# Altium PCB PCB.PcbDoc (part 1 of 2)
Units mil, origin at the board's own origin, x right, y up, seen from the top; angles counter-clockwise.
Board outline 7300 x 4900 mil, 2 copper layers (Top Layer, Bottom Layer); 73 components, 57 nets, 300 pads, 64 vias.
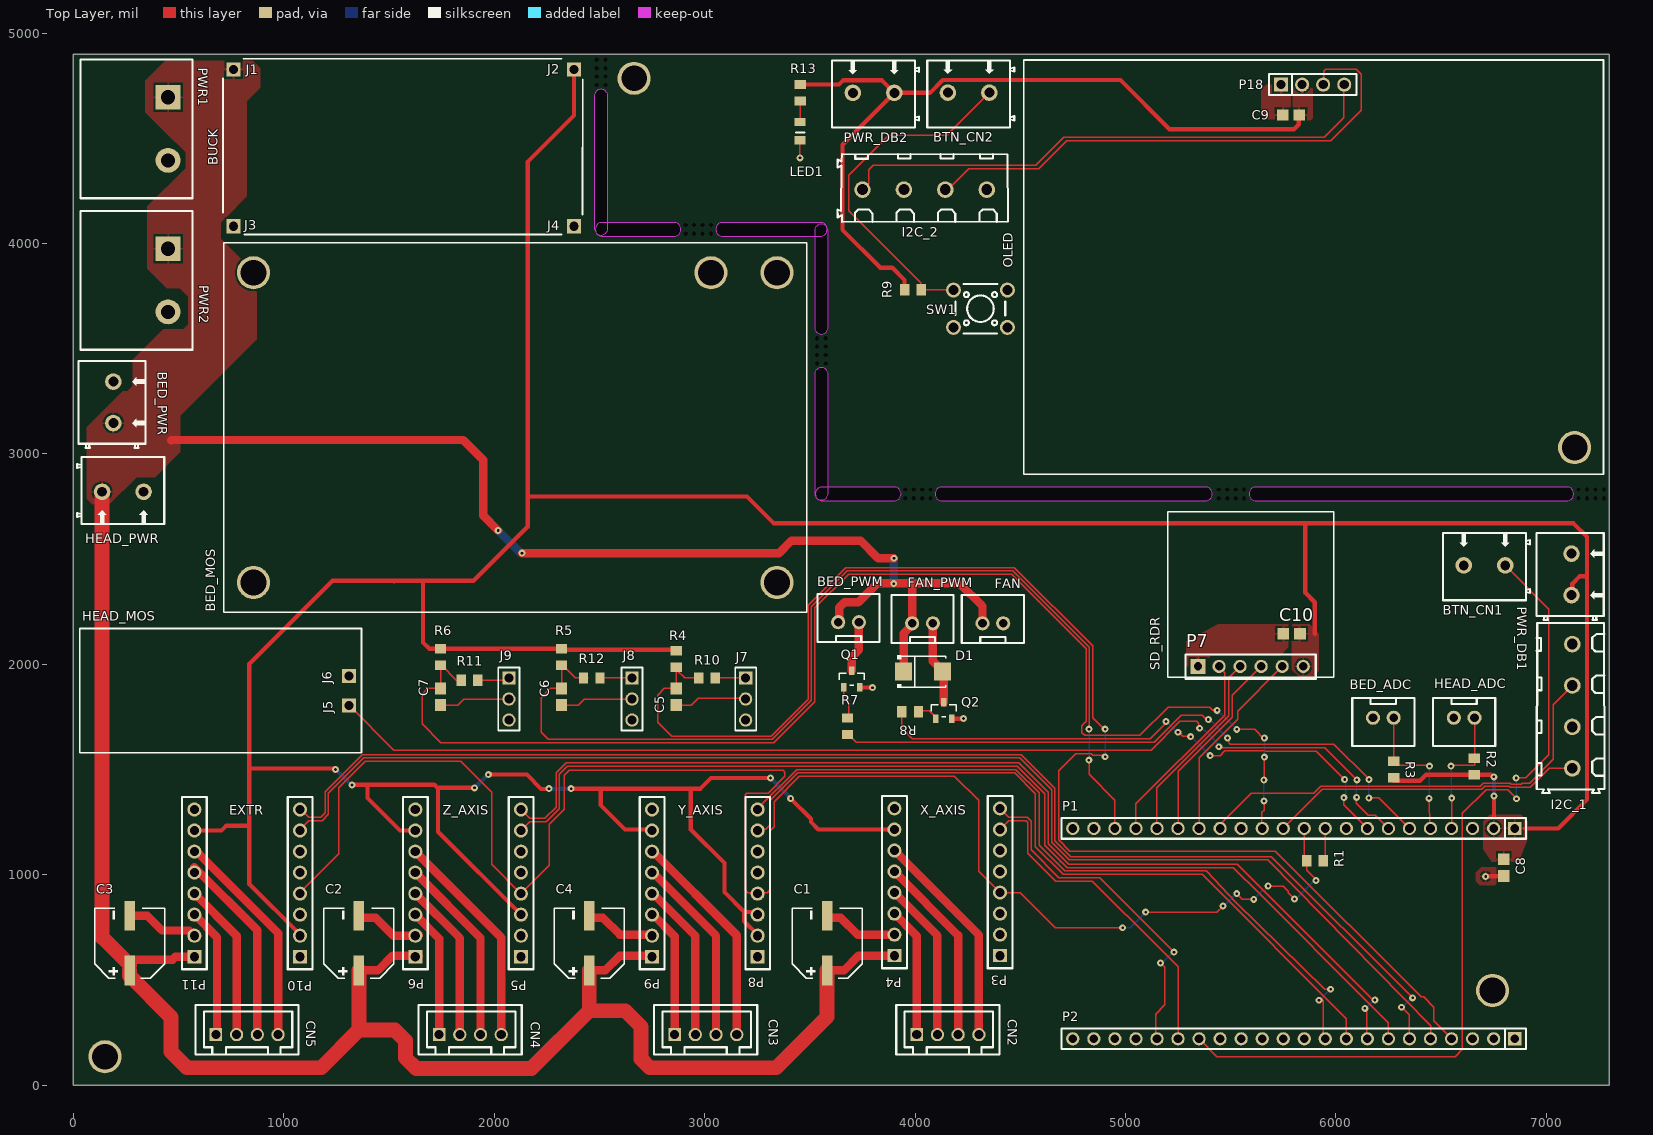
[diagram p0: Top Layer view]
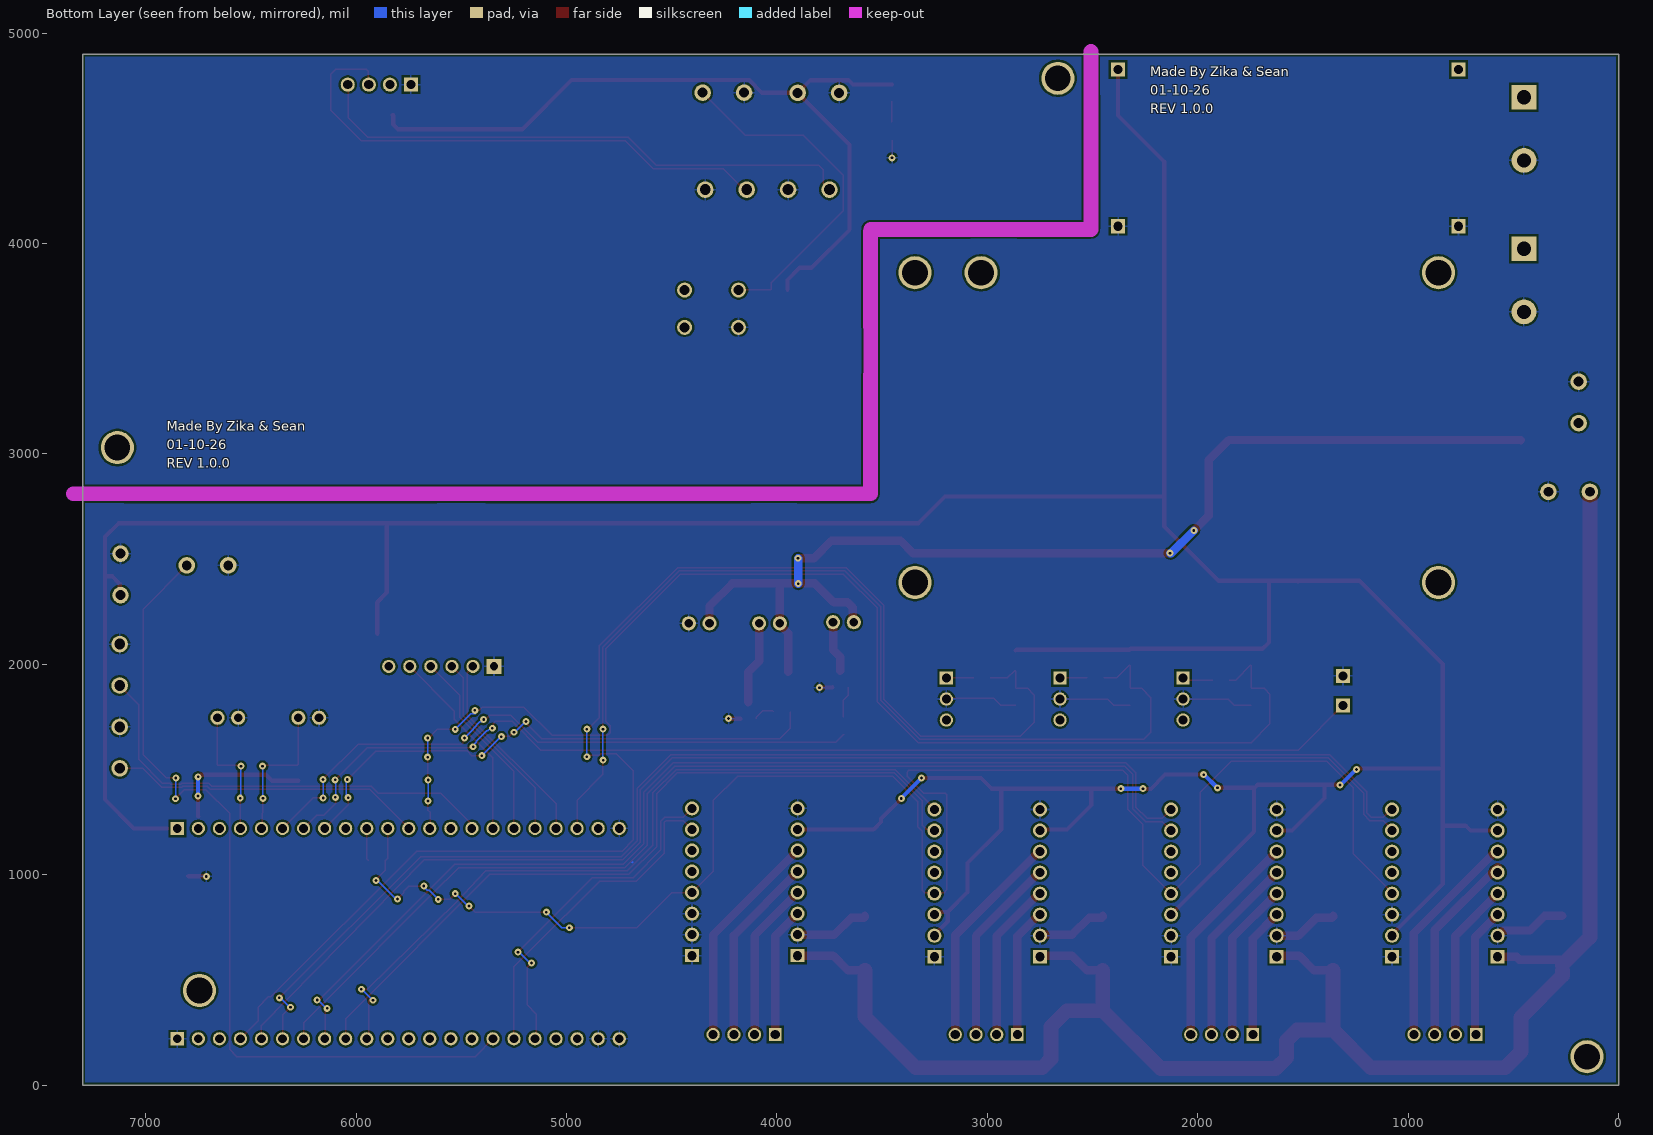
[diagram p1: Bottom Layer view, seen from below]

## Layer stack, top to bottom
Top Solder: solder mask 0.4, Solder Resist, Dk 3.5
Top Layer: signal copper 1.4
Dielectric 1: dielectric 12.6, FR-4, Dk 4.8
Bottom Layer: signal copper 1.4
Bottom Solder: solder mask 0.4, Solder Resist, Dk 3.5

## Board outline
0,0 7300,0 7300,4900 0,4900
cut-out: 5620,2842.51 ccw(c5620,2810) 5620,2777.49 7098,2777.49 ccw(c7098,2810) 7098,2842.51
cut-out: 4128,2842.51 ccw(c4128,2810) 4128,2777.49 5380,2777.49 ccw(c5380,2810) 5380,2842.51
cut-out: 3901,2777.49 ccw(c3901,2810) 3901,2842.51 3559,2842.51 ccw(c3559,2810) 3559,2777.49
cut-out: 3587.52,3377 ccw(c3555,3377) 3522.48,3377 3522.48,2814 ccw(c3555,2814) 3587.52,2814
cut-out: 3522.48,3602 ccw(c3555,3602) 3587.52,3602 3587.52,4059 ccw(c3555,4059) 3522.48,4059
cut-out: 3550,4034.48 ccw(c3550,4067) 3550,4099.52 3086,4099.52 ccw(c3086,4067) 3086,4034.48
cut-out: 2855,4034.48 ccw(c2855,4067) 2855,4099.52 2513,4099.52 ccw(c2513,4067) 2513,4034.48
cut-out: 2475.49,4072.57 ccw(c2508,4072.57) 2540.51,4072.57 2540.51,4700 ccw(c2508,4700) 2475.49,4700

## Design rules (kind name [scope] priority, off if disabled: settings)
BoardOutlineClearance [All] p1: gap=13 ignorepadtopadclearanceinfootprint=FALSE
Clearance Mousebites [IsPad vs IsKeepout] p1: gap=0 ignorepadtopadclearanceinfootprint=FALSE
Clearance Via_Net_Clr [IsVia vs IsNet] p2: gap=6 ignorepadtopadclearanceinfootprint=FALSE
Clearance Min_Clr [IsNet vs IsNet] p3: gap=10 ignorepadtopadclearanceinfootprint=FALSE
Clearance [All] p4: gap=10 ignorepadtopadclearanceinfootprint=FALSE except(0: Arc-Hole Track-Hole SMDPad-Hole THPad-Hole Via-Hole Fill-Hole Poly-Hole Region-Hole Text-Hole)
ComponentClearance Allow_Nested_Head [InComponent('J5') or InComponent('J6') vs InComponent('DB3')] p1: gap=-10 collisioncheckmode=3 verticalgap=-10 showdistances=FALSE
ComponentClearance Allow_Nested_Buck [InComponent('J1') or InComponent('J2') or InComponent('J3') or InComponent('J4') vs InComponent('DB1')] p2: gap=-10 collisioncheckmode=3 verticalgap=-10 showdistances=FALSE
ComponentClearance ComponentClearance_1 [All] p3: gap=10 collisioncheckmode=3 verticalgap=10 showdistances=FALSE
HoleSize Via_Min_Hole [IsVia] p1: absolutevalues=TRUE maxlimit=100 minlimit=10 maxpercent=80.000 minpercent=20.000
HoleToHoleClearance Pad_To_Via [IsPad vs IsVia] p2: gap=157.48 allowstackedmicrovias=TRUE
HoleToHoleClearance Via_Hole_To_Hole [All] p3: gap=10 allowstackedmicrovias=TRUE
MinimumAnnularRing [IsVia] p1: minimumring=10
PolygonConnect [All] p1: connectstyle=Relief reliefconductorwidth=10 reliefentries=4 polygonreliefangle="90 Angle" airgapwidth=10
RoutingVias Via_Size [All] p1: holewidth=13 width=33 viastyle="Through Hole" minholewidth=13 minwidth=33 maxholewidth=13 maxwidth=33
RoutingVias [All] p2: holewidth=28 width=50 viastyle="Through Hole" minholewidth=28 minwidth=50 maxholewidth=28 maxwidth=50
SilkToSolderMaskClearance [IsPad] p1: minsilkscreentomaskgap=0 clearancetoexposedcopper=TRUE
SolderMaskExpansion [All] p1: expansion=4 istentingtop=FALSE
Width "GND Width" [InNetClass('GND')] p1: maxlimit=40 minlimit=6 preferedwidth=6
Width "Signals Width" [InNetClass('SIG')] p2: maxlimit=15 minlimit=6 preferedwidth=6
Width "Schematic Width Constraint_1" [InNet('24V')] p3: maxlimit=325 minlimit=40 preferedwidth=40
Width "Schematic Width Constraint" [InNetClass('3V3-PWR')] p4: maxlimit=20 minlimit=20 preferedwidth=20
27 further rules are at their usual default settings.

## Classes and differential pairs
net class GND: GND_MB
net class SIG: "BED ADC" "BED MOS PWM" BTN "DIR E" "DIR X" "DIR Y" "DIR Z" "ENDST X" "ENDST Y" "ENDST Z" "FAN PWM" "HEAD ADC" "HEAD MOS PWM" "I2C OLED SCL" "I2C OLED SDA" NetJ7_1 NetJ8_1 NetJ9_1 NetLED1_2 NetQ1_1 NetQ2_1 "OLED SCL" "OLED SDA" "SD FSPI CLK" "SD FSPI CS" "SD FSPI MISO" "SD FSPI MOSI" "STEP E" "STEP X" "STEP Y" "STEP Z" "TMC UART RX" "TMC UART TX" "USER BTN"
net class 24V-PWR: 24V "M1A E" "M1A X" "M1A Y" "M1A Z" "M1B E" "M1B X" "M1B Y" "M1B Z" "M2A E" "M2A X" "M2A Y" "M2A Z" "M2B E" "M2B X" "M2B Y" "M2B Z" NetBED_PWM_2 NetD1_2
net class 3V3-PWR: 3V3_DB 3V3_MB
component class MotherBoard: BED_ADC BED_PWM BED_PWR BTN_CN1 C1 C2 C3 C4 C5 C6 C7 C8 C10 CN2 CN3 CN4 CN5 D1 FAN FAN_PWM HEAD_ADC HEAD_MOS HEAD_PWR I2C_1 J1 J2 J3 J4 J5 J6 J7 J8 J9 P1 P2 P3 P4 P5 P6 P7 P8 P9 P10 P11 PWR1 PWR2 PWR_DB1 Q1 Q2 R1 R2 R3 R4 R5 R6 R7 R8 R10 R11 R12
component class DaughterBoard: BTN_CN2 C9 I2C_2 LED1 OLED P18 PWR_DB2 R9 R13 SD_RDR SW1

## Components (designator, comment, footprint, x,y, rotation, side; value= is the part's Value field where it differs from the comment)
BED_ADC "sh-xh2.54-2p" XH-2P 6225.7,1746 r0 top
BED_MOS "Comment" Bed-MOSFET 2100,3125 r0 top
BED_PWM "sh-xh2.54-2p" XH-2P 3684.3,2200 r180 top
BED_PWR "wj127-5.0-02p-14-00a" Screw-Terminal-2P 190,3245 r90 top
BTN_CN1 "wj127-5.0-02p-14-00a" Screw-Terminal-2P 6706.6,2470 r180 top
BTN_CN2 "wj127-5.0-02p-14-00a" Screw-Terminal-2P 4255,4717 r180 top
BUCK "Comment" DC-Buck-Converter 1565,4460 r0 top
C1 "100uF" Capacitor-100uF 3582,675 r90 top
C2 "100uF" Capacitor-100uF 1357,675 r90 top
C3 "100uF" Capacitor-100uF 267,675 r90 top
C4 "100uF" Capacitor-100uF 2452,675 r90 top
C5 "100nF" Capacitor-100nF-0805 2865,1845.6 r90 top
C6 "100nF" Capacitor-100nF-0805 2320,1845.6 r90 top
C7 "100nF" Capacitor-100nF-0805 1745,1845.6 r90 top
C8 "22uF" Capacitor-22uF-0805 6798,1033.6 r90 top
C9 "22uF" Capacitor-22uF-0805 5786.6,4611 r180 top
C10 "22uF" Capacitor-22uF-0805 5790,2145 r180 top
CN2 "sh-xh2.54-4p" XH-4P 4155.8,240 r0 top
CN3 "sh-xh2.54-4p" XH-4P 3005,240 r0 top
CN4 "sh-xh2.54-4p" XH-4P 1885.8,240 r0 top
CN5 "sh-xh2.54-4p" XH-4P 825,240 r0 top
D1 "s3mb-13-f" Diode-1N4007-SMA 4038.5,1965 r0 top
FAN "sh-xh2.54-2p" XH-2P 4370,2195 r180 top
FAN_PWM "sh-xh2.54-2p" XH-2P 4035.8,2195 r180 top
HEAD_ADC "sh-xh2.54-2p" XH-2P 6610,1746 r0 top
HEAD_MOS "Head-MOSFET" Head-MOSFET 700,1875 r180 top (schematic designator DB3)
HEAD_PWR "wj127-5.0-02p-14-00a" Screw-Terminal-2P 235,2820 r0 top
I2C_1 "wj127-5.0-04p-14-00a" Screw-Terminal-4P 7124,1800.8 r90 top
I2C_2 "wj127-5.0-04p-14-00a" Screw-Terminal-4P 4045.8,4256 r0 top
J1 "2.54-1*1p针" Male-Header-1P 761,4827 r0 top
J2 "2.54-1*1p针" Male-Header-1P 2379,4827 r0 top
J3 "2.54-1*1p针" Male-Header-1P 761,4082 r0 top
J4 "2.54-1*1p针" Male-Header-1P 2379,4082 r0 top
J5 "2.54-1*1p针" Male-Header-1P 1310,1805 r90 top
J6 "2.54-1*1p针" Male-Header-1P 1310,1945 r0 top
J7 "2.54-1*3p针" Male-Header-3P 3195,1835 r270 top
J8 "2.54-1*3p针" Male-Header-3P 2655,1835 r270 top
J9 "2.54-1*3p针" Male-Header-3P 2070,1835 r270 top
LED1 "ncd0805r1_c84256" RED-LED-0805 3454,4533.7 r90 top
OLED "OLED-I2C" I2C-OLED 5894,3888 r0 top (schematic designator DB4)
P1 "fh2.54-09-22pzd" Female-Header-22P 5800,1220 r180 top
P2 "fh2.54-09-22pzd" Female-Header-22P 5800,220 r180 top
P3 "2.54-1*8p母环保" Female-Header-8P 4404,965 r90 top
P4 "2.54-1*8p母环保" Female-Header-8P 3902,965 r90 top
P5 "2.54-1*8p母环保" Female-Header-8P 2127,960 r90 top
P6 "2.54-1*8p母环保" Female-Header-8P 1625,960 r90 top
P7 "2.54-1*6p" Female-Header-6P 5595,1990 r0 top
P8 "2.54-1*8p母环保" Female-Header-8P 3252,960 r90 top
P9 "2.54-1*8p母环保" Female-Header-8P 2750,960 r90 top
P10 "2.54-1*8p母环保" Female-Header-8P 1077,960 r90 top
P11 "2.54-1*8p母环保" Female-Header-8P 575,960 r90 top
P18 "2.54-1*4P" Female-Header-4P 5890,4755 r0 top
PWR1 "dbt30s-7.62-2p-bk-p" Barrier-Terminal-2P 450,4545 r270 top
PWR2 "dbt30s-7.62-2p-bk-p" Barrier-Terminal-2P 450,3825 r270 top
PWR_DB1 "wj127-5.0-02p-14-00a" Screw-Terminal-2P 7120,2427.4 r90 top
PWR_DB2 "wj127-5.0-02p-14-00a" Screw-Terminal-2P 3803,4716 r180 top
Q1 "ktc3265(range:160-320)" NPN-SOT23-30V 3699.3,1930 r270 top
Q2 "ktc3265(range:160-320)" NPN-SOT23-30V 4136.5,1780 r270 top
R1 "4.7k" Resistor-4.7k-0805 5900.7,1066 r180 top value=4.7kΩ
R2 "4.7k" Resistor-4.7k-0805 6657.3,1514.6 r90 top value=4.7kΩ
R3 "4.7k" Resistor-4.7k-0805 6275,1500.7 r270 top value=4.7kΩ
R4 "4.7k" Resistor-4.7k-0805 2865,2025.6 r90 top value=4.7kΩ
R5 "4.7k" Resistor-4.7k-0805 2320,2034.3 r90 top value=4.7kΩ
R6 "4.7k" Resistor-4.7k-0805 1745,2034.3 r90 top value=4.7kΩ
R7 "1k" Resistor-1k-0805 3679.3,1705.7 r270 top value=1kΩ
R8 "1k" Resistor-1k-0805 3977.1,1775 r0 top value=1kΩ
R9 "4.7k" Resistor-4.7k-0805 3990,3780 r180 top value=4.7kΩ
R10 "1k" Resistor-1k-0805 3011.6,1935 r0 top value=1kΩ
R11 "1k" Resistor-1k-0805 1883.3,1925 r0 top value=1kΩ
R12 "1k" Resistor-1k-0805 2463.6,1935 r0 top value=1kΩ
R13 "220" Resistor-220-0805 3454,4716.4 r270 top value=220Ω
SD_RDR "SD-Card-Module" SD-Card-Module 5596,2331 r180 top (schematic designator DB5)
SW1 "ts6685h-250gf" Tactile-SPST-Long 4311,3690 r0 top

## Footprints (in the part's own frame and the unit in brackets; to place one, negate y for a bottom-side part, rotate by r counter-clockwise, add the part's x,y. Pads: shape width x height; smd on the part's side, far side on the other; paste and mask are expansions set on the pad)
Barrier-Terminal-2P [mil]
  rect 118.1x118.1 hole 66.9: 1(-150,0)
  round 118.1 hole 66.9: 2(150,0)
  silkscreen extent -330,-415 330,116
Bed-MOSFET [mm]
  round 4 hole 3.1 unplated: 1(-31.6,-18.7) 1(-31.6,18.7) 1(31.6,-18.7) 1(31.6,18.7)
  silkscreen extent -35.2,-22.3 35.2,22.3
Capacitor-22uF-0805 [mil]
  rect 55.5x53.1 smd paste-3937 mask+2: 1(-39.4,0) 2(39.4,0)
Capacitor-100nF-0805 [mil]
  rect 55.5x53.1 smd paste-3937 mask+2: 1(-39.4,0) 2(39.4,0)
Capacitor-100uF [mil]
  rect 142.1x49.6 smd: 1(-129.7,0) 2(129.7,0)
  silkscreen extent -166,-166 166,166
DC-Buck-Converter [mil]
  silkscreen extent -854,-417 855,417
Diode-1N4007-SMA [mil]
  rect 80.6x86.3 smd: 1(-92.9,0) 2(93,0)
  silkscreen extent -123,-77 108,77
Female-Header-4P [mm]
  rect 1.7x1.7 hole 1.1 paste+0 mask+0.051: 1(-3.81,0)
  round 1.7 hole 1.1 paste+0 mask+0.051: 2(-1.27,0) 3(1.27,0) 4(3.81,0)
  silkscreen extent -5.29,-1.27 5.29,1.27
Female-Header-6P [mil]
  rect 70.9x70.9 hole 40.2: 1(-250,0)
  round 63 hole 40.2: 2(-150,0) 3(-50,0) 4(50,0) 5(150,0) 6(250,0)
  silkscreen extent -310,-59 310,56
Female-Header-8P [mil]
  rect 62x66.9 hole 43.3: 1(-350,0)
  round 66.9 hole 43.3: 2(-250,0) 3(-150,0) 4(-50,0) 5(50,0) 6(150,0) 7(250,0) 8(350,0)
  silkscreen extent -409,-59 410,58
Female-Header-22P [mil]
  rect 63x63 hole 41.3: 1(-1050,0)
  round 63 hole 41.3: 2(-950,0) 3(-850,0) 4(-750,0) 5(-650,0) 6(-550,0) 7(-450,0) 8(-350,0) 9(-250,0) 10(-150,0) 11(-50,0) 12(50,0) 13(150,0) 14(250,0) 15(350,0) 16(450,0) 17(550,0) 18(650,0) 19(750,0) 20(850,0) 21(950,0) 22(1050,0)
  silkscreen extent -1105,-49 1105,49
Head-MOSFET [mil]
  silkscreen extent -669,-295 669,295
I2C-OLED [mil]
  silkscreen extent -1378,-984 1378,984
Male-Header-1P [mil]
  rect 66.9x66.9 hole 43.3: 1(0,0)
Male-Header-3P [mil]
  rect 62x63 hole 43.3 paste+0 mask+2: 1(-100,0)
  round 63 hole 43.3 paste+0 mask+2: 2(0,0) 3(100,0)
  silkscreen extent -150,-50 150,50
NPN-SOT23-30V [mil]
  rect 39.4x25.6 smd: 1(39.3,-37.4) 2(39.3,37.4) 3(-39.4,0)
  silkscreen extent -29,-60 29,60
RED-LED-0805 [mm]
  rect 1x1.35 smd: 1(-1.1,0) 2(1.1,0)
  silkscreen extent -0.18,-0.5 -0.18,0.5
Resistor-1k-0805 [mil]
  rect 44.6x54.2 smd paste-3937 mask+2: 1(-39.3,0) 2(39.4,0)
Resistor-4.7k-0805 [mil]
  rect 44.6x54.2 smd paste-3937 mask+2: 1(-39.3,0) 2(39.4,0)
Resistor-220-0805 [mil]
  rect 44.6x54.2 smd paste-3937 mask+2: 1(-39.3,0) 2(39.4,0)
Screw-Terminal-2P [mil]
  round 78.7 hole 47.2: 1(-98.6,0) 2(98.6,0)
  silkscreen extent -217,-154 197,165
Screw-Terminal-4P [mil]
  round 78.7 hole 51.2: 1(-295.3,0) 2(-98.5,0) 3(98.4,0) 4(295.2,0)
  silkscreen extent -413,-154 395,170
SD-Card-Module [mil]
  silkscreen extent -394,-394 394,394
Tactile-SPST-Long [mil]
  round 70.9 hole 47.2: 1(-128,88.6) 2(127.9,88.6) 3(-128,-88.6) 4(127.9,-88.6)
  silkscreen extent -118,-118 118,118
XH-2P [mil]
  round 66.9 hole 41.3 paste+0 mask+2: 1(49.3,0) 2(-49.2,0)
  silkscreen extent -148,-135 148,94
XH-4P [mil]
  rect 60x63 hole 43.3: 1(-147.6,0)
  round 63 hole 43.3: 2(-49.2,0) 3(49.2,0) 4(147.7,0)
  silkscreen extent -245,-95 245,140

## Part data
BED_ADC BED_PWM FAN FAN_PWM HEAD_ADC: library part XH-2P, "Pins Structure:1x2P Pitch:2.5mm Mounting Type:Through Hole Number of Pins:2P Number of Rows:1 Number of PINs Per Row:2 Current Rating:3A Contact Material:Brass Contact Plating:Tin Operating Temperature:-25℃~+85℃ Operating Temperature:-25℃~+85℃ Voltage Rat", Color=White, Current Rating=3A, Flame Retardant Rating=UL94V-0, JLCPCB Part Class="Extended Part", LCSC Part Name="1x2P 间距:2.5mm 直插", Manufacturer=深海电子, ManufacturerPart=SH-XH2.54-2P, Operating Temperature=-25℃~+85℃, Voltage Rating=250V, AddInBom=yes, Contact Material=Brass, Contact Plating=Tin, ConvertToPcb=yes, Datasheet=https://item.szlcsc.com/datasheet/SH-XH2.54-2P/56320007.html, FootprintName=CONN-TH_2P-P2.50-XH2.54-2P, ModelId=0fe0934827c24a35ba1321e64395c7dc, ModelName=CONN-TH_2P-P2.50-XH2.54-2P, ModelTransform=295.275,228.346,0,180,0,0,-0.002,-20.079,-137.795, Mounting Type="Through Hole", Number of Pins=2P, Number of PINs Per Row=2, Number of Rows=1, Pins Structure=1x2P, Pitch=2.5mm, Plastic Material=PA66, Supplier=LCSC, Supplier Footprint=插件,P=2.5mm, SupplierPart=C53261323, Symbol=SH-XH2.54-2P, X-Length of Bottom Edge on Board (Spacing Line)=7.5mm, Y-Width of Bottom Edge on Board=5.8mm, Z-Height of the Board=7.1mm
BED_PWR BTN_CN1 BTN_CN2 HEAD_PWR PWR_DB1 PWR_DB2: library part Screw-Terminal-2P, "Number of Positions or Pins:1x2P Pitch:5mm Color:Green Mounting Type:Through Hole Number of Pins:2P Number of Rows:1 Number of PINs Per Row:2 Screw Specification:M2.5 Current Rating:15A Voltage Rating (Max):250V Wire Gauge - AWG:14~26 Wire Gauge - mm2:1.5", Color=Green, Current Rating=15A, JLCPCB Part Class="Extended Part", LCSC Part Name="1x2P 5mm 直插 排数:1 每排P数:2", Manufacturer=KANGNEX(康奈克斯电气), ManufacturerPart=WJ127-5.0-02P-14-00A, Operating Temperature=-40℃~+105℃, Voltage Rating (Max)=250V, AddInBom=yes, ConvertToPcb=yes, Datasheet=https://item.szlcsc.com/datasheet/WJ127-5.0-02P-14-00A/4105.html, FootprintName=CONN-TH_2P-P5.00_CPC3703CTR, Height Above Board=10.14mm, ModelId=0c699dafc1fb4759bdee4490ad46ecba, ModelName=CONN-TH_2P-P5.00_CPC3703CTR, ModelTransform=416.145,318.897,0,0,0,0,-11.811,5.315,-149.606, Mounting Type="Through Hole", Number of Pins=2P, Number of PINs Per Row=2, Number of Positions or Pins=1x2P, Number of Rows=1, Pitch=5mm, Screw Specification=M2.5, Supplier=LCSC, Supplier Footprint=插件,P=5mm, SupplierPart=C3703, Symbol=WJ127-5.0-2P, Wire Gauge - AWG=14~26, Wire Gauge - mm2=1.5
C1 C2 C3 C4: library part Capacitor-100uF, "Capacitance:100uF Tolerance:±20% Tolerance:±20% Voltage Rating:50V Ripple Current:146mA@120Hz Equivalent Series Resistance(ESR):- Diameter:8mm Height - Seated (Max):10.2mm Lifetime:2800hrs@105℃ Operating Temperature:-55℃~+105℃ Operating Temperature:-55℃~+", Equivalent Series Resistance(ESR)=-, JLCPCB Part Class="Extended Part", LCSC Part Name="100uF ±20% 50V", Manufacturer=DMBJ(振宝佳), ManufacturerPart="RVT1H101M0810 100UF 50V", Operating Temperature=-55℃~+105℃, Ripple Current=146mA@120Hz, Tolerance=±20%, Voltage Rating=50V, AddInBom=yes, ConvertToPcb=yes, Datasheet=https://item.szlcsc.com/datasheet/RVT1H101M0810%2520100UF%252050V/1060415.html, Diameter=8mm, FootprintName=CAP-SMD_BD8.0-L8.3-W8.3-LS9.1-FD, Height - Seated (Max)=10.2mm, Lifetime=2800hrs@105℃, ModelId=9f9fc6857dc54a0ab164c419dde4584d, ModelName=CAP-SMD_BD8.0-L8.3-W8.3-LS9.1-FD, ModelTransform=358.267,326.771,0,0,0,0,0,0,0, Supplier=LCSC, Supplier Footprint=SMD,D8xL10.2mm, SupplierPart=C970687, Symbol="RVT1H101M0810 100UF 50V"
C5 C6 C7: library part Capacitor-100nF-0805, "Capacitance:100nF Tolerance:±10% Tolerance:±10% Voltage Rating:50V Temperature Coefficient:X7R", JLCPCB Part Class="Extended Part", LCSC Part Name="100nF ±10% 50V", Manufacturer=SAMSUNG(三星), ManufacturerPart=CL21B104KBCNNNC, Temperature Coefficient=X7R, Tolerance=±10%, Voltage Rating=50V, AddInBom=yes, ConvertToPcb=yes, Datasheet=https://item.szlcsc.com/datasheet/CL21B104KBCNNNC/2063.html, FootprintName=C0805, ModelId=8c88e81f49c6409b980720ec8953afb6, ModelName=C0805_L2.0-W1.3-H1.3, ModelTransform=78.74,51.181,0,0,0,0,0,0.0005,0, Supplier=LCSC, Supplier Footprint=0805, SupplierPart=C1711, Symbol=CL21B104KBCNNNC
C8 C9 C10: library part Capacitor-22uF-0805, "Capacitance:22uF Tolerance:±20% Tolerance:±20% Voltage Rating:10V Temperature Coefficient:X5R", JLCPCB Part Class="Extended Part", LCSC Part Name="22uF ±20% 10V", Manufacturer=SAMSUNG(三星), ManufacturerPart=CL21A226MPQNNNE, Temperature Coefficient=X5R, Tolerance=±20%, Voltage Rating=10V, AddInBom=yes, ConvertToPcb=yes, Datasheet=https://item.szlcsc.com/datasheet/CL21A226MPQNNNE/30029.html, FootprintName=C0805, ModelId=8c88e81f49c6409b980720ec8953afb6, ModelName=C0805_L2.0-W1.3-H1.3, ModelTransform=78.74,51.181,0,0,0,0,0,0.0005,0, Supplier=LCSC, Supplier Footprint=0805, SupplierPart=C29277, Symbol=CL21A226MPQNNNE
CN2 CN3 CN4 CN5: library part XH-4P, "Pins Structure:1x4P Pitch:2.5mm Mounting Type:Through Hole Number of Pins:4P Number of Rows:1 Number of PINs Per Row:4 Current Rating:3A Contact Material:Brass Contact Plating:Tin Operating Temperature:-25℃~+85℃ Operating Temperature:-25℃~+85℃ Voltage Rat", Color=White, Current Rating=3A, Flame Retardant Rating=UL94V-0, JLCPCB Part Class="Extended Part", LCSC Part Name="1x4P 间距:2.5mm 直插", Manufacturer=深海电子, ManufacturerPart=SH-XH2.54-4P, Operating Temperature=-25℃~+85℃, Voltage Rating=250V, AddInBom=yes, Contact Material=Brass, Contact Plating=Tin, ConvertToPcb=yes, Datasheet=https://item.szlcsc.com/datasheet/SH-XH2.54-4P/56320009.html, FootprintName=CONN-TH_4P-P2.50_4PIN, ModelId=d6f2687bc06b47fb8e014feb06c7c5ec, ModelName=CONN-TH_4P-P2.50_4PIN, ModelTransform=492.125,224.409,0,180,0,0,0,17.717,-118.11, Mounting Type="Through Hole", Number of Pins=4P, Number of PINs Per Row=4, Number of Rows=1, Pins Structure=1x4P, Pitch=2.5mm, Plastic Material=PA66, Supplier=LCSC, Supplier Footprint=插件,P=2.5mm, SupplierPart=C53261325, SymbolName=SH-XH2.54-4P, X-Length of Bottom Edge on Board (Spacing Line)=12.5mm, Y-Width of Bottom Edge on Board=5.8mm, Z-Height of the Board=7.1mm
D1: library part Diode-1N4007-SMA, "Diode Configuration:1 Independent Voltage - Forward(Vf@If):1.15V@3A Voltage - DC Reverse(Vr):1kV Current - Rectified:3A Reverse Leakage Current (Ir):10uA@1kV Non-Repetitive Peak Forward Surge Current:- Operating Junction Temperature Range:-65℃~+150℃ Opera", Current - Rectified=3A, JLCPCB Part Class="Extended Part", LCSC Part Name="1kV 3A", Manufacturer=DIODES(美台), Manufacturer Part=S3MB-13-F, Non-Repetitive Peak Forward Surge Current=-, Operating Junction Temperature Range=-65℃~+150℃, Reverse Leakage Current (Ir)=10uA@1kV, Voltage - DC Reverse(Vr)=1kV, Voltage - Forward(Vf@If)=1.15V@3A, AddInBom=yes, ConvertToPcb=yes, Datasheet=https://item.szlcsc.com/datasheet/S3MB-13-F/71522.html, Diode Configuration="1 Independent", FootprintName=SMB_L4.6-W3.6-LS5.3-RD, ModelId=6383b9be09eb4825906cf4ce91b85cee, ModelName=SMB_L4.6-W3.6-LS5.3-RD, ModelTransform=212.598,141.732,0,0,0,0,0,0,0, Supplier=LCSC, Supplier Footprint=SMB(DO-214AA), SupplierPart=C70426, Symbol=S3MB-13-F
I2C_1 I2C_2: library part Screw-Terminal-4P, "Number of Positions or Pins:1x4P Pitch:5mm Color:Green Mounting Type:Through Hole Number of Pins:4P Number of Rows:1 Number of PINs Per Row:4 Screw Specification:M2.5 Current Rating:15A Voltage Rating (Max):250V Wire Gauge - AWG:14~26 Wire Gauge - mm2:1.5", Color=Green, Current Rating=15A, JLCPCB Part Class="Extended Part", LCSC Part Name="1x4P 5mm 直插 排数:1 每排P数:4", Manufacturer=KANGNEX(康奈克斯电气), ManufacturerPart=WJ127-5.0-04P-14-00A, Operating Temperature=-40℃~+105℃, Voltage Rating (Max)=250V, AddInBom=yes, ConvertToPcb=yes, Datasheet=https://item.szlcsc.com/datasheet/WJ127-5.0-04P-14-00A/225182.html, FootprintName=CONN-TH_4P-P5.00_WJ127-5.0-4P, Height Above Board=10.14mm, ModelId=30be887f740a4f6bacb9c64f3bb40a03, ModelName=CONN-TH_WJ5.00-LI-4P-127, ModelTransform=807.0748,318.897,0,0,0,0,-9.843,7.874,-157.48, Mounting Type="Through Hole", Number of Pins=4P, Number of PINs Per Row=4, Number of Positions or Pins=1x4P, Number of Rows=1, Pitch=5mm, Screw Specification=M2.5, Supplier=LCSC, Supplier Footprint=插件,P=5mm, SupplierPart=C192779, Symbol=WJ127-5.0-4P, Wire Gauge - AWG=14~26, Wire Gauge - mm2=1.5
J1 J2 J3 J4 J5 J6: library part Male-Header-1P, "Pin Structure:1x1P Pitch:- Row Spacing:- Circluar Pins/Square Pins:Pin Header Mounting Type:Through Hole Number of Rows:1 Number of Pins:1P Current Rating:3A Voltage Rating (Max):- Length of Mating Pin:6mm Insulation Height:2.5mm Length of End Connection", Color=Black, Current Rating=3A, JLCPCB Part Class="Extended Part", LCSC Part Name="1x1P 方针 直插", Manufacturer=BOOMELE(博穆精密), ManufacturerPart=2.54-1*1P针, Operating Temperature=-55℃~+105℃, Voltage Rating (Max)=-, AddInBom=yes, Circluar Pins/Square Pins="Pin Header", Contact Material=Brass, Contact Plating=Gold, ConvertToPcb=yes, Datasheet=https://item.szlcsc.com/datasheet/2.54-1*1P%25E9%2592%2588/82426.html, FootprintName=HDR-TH_1P-P2.54-V-M, Insulation Height=2.5mm, Length of End Connection Pin=3mm, Length of Mating Pin=6mm, ModelId=78ee2cec6acf483d85077eb0624e0da7, ModelName=HDR2.54-M-LI-1X1P, ModelTransform=100,100,0,0,0,0,0,0,-118.11, Mounting Type="Through Hole", Number of Pins=1P, Number of Rows=1, Pin Structure=1x1P, Pitch=-, Row Spacing=-, Supplier=LCSC, Supplier Footprint=插件,P=2.54mm, SupplierPart=C81276, Symbol=Header-Male-2.54_1x1
J7 J8 J9: library part Male-Header-3P, "Pin Structure:1x3P Pitch:2.54mm Row Spacing:- Circluar Pins/Square Pins:Pin Header Mounting Type:Through Hole Number of Rows:1 Number of Pins:3P Current Rating:3A Voltage Rating (Max):- Length of Mating Pin:6mm Insulation Height:2.5mm Length of End Connec", Color=Black, Current Rating=3A, JLCPCB Part Class="Extended Part", LCSC Part Name="1x3P 间距:2.54mm 方针 直插", Manufacturer=BOOMELE(博穆精密), ManufacturerPart=2.54-1*3P针, Operating Temperature=-40℃~+105℃, Voltage Rating (Max)=-, AddInBom=yes, Circluar Pins/Square Pins="Pin Header", Contact Material=Brass, Contact Plating=Gold, ConvertToPcb=yes, Datasheet=https://item.szlcsc.com/datasheet/2.54-1*3P%25E9%2592%2588/50265.html, FootprintName=HDR-TH_3P-P2.54-V-M-1, Insulation Height=2.5mm, Length of End Connection Pin=3mm, Length of Mating Pin=6mm, ModelId=3b8cf4ff435f4f2b912293f2932d0598, ModelName=HDR-M-2.54_1x3, ModelTransform=299.9994,100,0,0,0,0,0,0,-118.11, Mounting Type="Through Hole", Number of Pins=3P, Number of Rows=1, Pin Structure=1x3P, Pitch=2.54mm, Row Spacing=-, Supplier=LCSC, Supplier Footprint=插件,P=2.54mm, SupplierPart=C49257, Symbol=Header-Male-2.54_1x3
LED1: library part RED-LED-0805, "Lamp Holder Type:- Illumination Color:Red Voltage - Forward(Vf):1.6V~2.6V Voltage - Forward(Vf):1.6V~2.6V Power(Watts):65mW Test Current:25mA Wavelength - Dominant:615nm~630nm Wavelength - Dominant:615nm~630nm Peak Wavelength:630nm Peak Wavelength:630nm D", Color Temperature=-, Illumination Color=Red, JLCPCB Part Class="Basic Part", LCSC Part Name=片式发光二极管, Manufacturer=国星光电, ManufacturerPart=NCD0805R1, Operating Temperature=-30℃~+85℃, Power(Watts)=65mW, Test Current=25mA, Voltage - Forward(Vf)=1.6V~2.6V, AddInBom=yes, ConvertToPcb=yes, Datasheet=https://item.szlcsc.com/datasheet/NCD0805R1/85425.html, Diode Configuration="Discrete Diode", Emitting Material=-, ESD Withstand Voltage=-, FootprintName=LED0805-RD, Half wave width=15nm, Lamp Holder Type=-, Lens Color=-, Lumens=-, Luminous Intensity=195mcd, ModelId=23093642268545519703b953fc993978, ModelName=LED0805-RD, ModelTransform=79.527,49.2125,0,0,0,0,0,0,0, Mounting Style=Top-mount, Peak Wavelength=630nm, Supplier=LCSC, Supplier Footprint=0805, SupplierPart=C84256, Symbol=FC-2012HRK-620D, Viewing Angle=130°, Wavelength - Dominant=615nm~630nm
P1 P2: library part Female-Header-22P, "Holes Structure:1x22P Pitch:2.54mm Circular Hole / Square Hole:Square Hole Mounting Type:Through Hole Number of Rows:1 Number of Positions:22P Current Rating:3A Holes Direction:Top Insulation Height:8.5mm Contact Material:Brass Contact Plating:Gold Operat", Current Rating=3A, JLCPCB Part Class="Extended Part", LCSC Part Name="1x22P 间距:2.54mm 直插", Manufacturer=XUNPU(讯普), ManufacturerPart=FH2.54-09-22PZD, Operating Temperature=-40℃~+105℃, AddInBom=yes, Circular Hole / Square Hole="Square Hole", Contact Material=Brass, Contact Plating=Gold, ConvertToPcb=yes, Datasheet=https://item.szlcsc.com/datasheet/FH2.54-09-22PZD/8579590.html, FootprintName=HDR-TH_22P-P2.54-V-F, Holes Direction=Top, Holes Structure=1x22P, Insulation Height=8.5mm, ModelId=676cdefe1703484f8a37377e34cf1f64, ModelName=HDR-TH_22P-P2.54-V-F, ModelTransform=2199.99552,98.425,0,0,0,0,0,0,-125.984, Mounting Type="Through Hole", Number of Positions=22P, Number of Rows=1, PIN Length=3.2mm, Pitch=2.54mm, Supplier=LCSC, Supplier Footprint=插件,P=2.54mm, SupplierPart=C7500786, SymbolName=FH2.54-09-22PZD
P3 P4 P5 P6 P8 P9 P10 P11: library part Female-Header-8P, "Holes Structure:1x8P Pitch:2.54mm Row Spacing:- Circular Hole / Square Hole:Square Hole Mounting Type:Through Hole Number of Rows:1 Number of Positions:8P Current Rating:3A Holes Direction:Top Insulation Height:8.5mm Contact Material:Brass Contact Plating", Current Rating=3A, JLCPCB Part Class="Extended Part", LCSC Part Name="1x8P 间距:2.54mm 直插", Manufacturer=BOOMELE(博穆精密), ManufacturerPart=2.54-1*8P母环保, Operating Temperature=-55℃~+105℃, AddInBom=yes, Circular Hole / Square Hole="Square Hole", Contact Material=Brass, Contact Plating=Gold, ConvertToPcb=yes, Datasheet=https://item.szlcsc.com/datasheet/2.54-1*8P%25E6%25AF%258D%25E7%258E%25AF%25E4%25BF%259D/28187.html, FootprintName=HDR-TH_8P-P2.54-V-F, Holes Direction=Top, Holes Structure=1x8P, Insulation Height=8.5mm, ModelId=6ab1dac21d924c3d8eea0dfa46d42ff5, ModelName=HDR-TH_8P-P2.54-V-F, ModelTransform=819.723,98.425,0,0,0,0,0,0,-118.11, Mounting Type="Through Hole", Number of Positions=8P, Number of Rows=1, PIN Length=3.2mm, Pitch=2.54mm, Row Spacing=-, Supplier=LCSC, Supplier Footprint=插件,P=2.54mm, SupplierPart=C27438, Symbol=Header-Female-2.54_1x8
P7: library part Female-Header-6P, "Holes Structure:1x6P Pitch:2.54mm Row Spacing:- Circular Hole / Square Hole:Square Hole Mounting Type:Through Hole Number of Rows:1 Number of Positions:6P Current Rating:3A Voltage Rating (Max):- Holes Direction:Top Insulation Height:8.5mm Contact Materia", Current Rating=3A, JLCPCB Part Class="Extended Part", LCSC Part Name="1x6P 间距:2.54mm 直插", Manufacturer=BOOMELE(博穆精密), Manufacturer Part=2.54-1*6P母, Operating Temperature=-40℃~+105℃, Voltage Rating (Max)=-, AddInBom=yes, Circular Hole / Square Hole="Square Hole", Contact Material=Brass, Contact Plating=Gold, ConvertToPcb=yes, Datasheet=https://item.szlcsc.com/datasheet/2.54-1*6P%25E6%25AF%258D/41861.html, FootprintName=HDR-TH_6P-P2.54-V-F, Holes Direction=Top, Holes Structure=1x6P, Insulation Height=8.5mm, ModelId=72da3eac8a074bb0a56a474e38d1760c, ModelName=HDR-TH_6P-P2.54-V-F, ModelTransform=619.684,94.488,0,0,0,0,0,0,-125.984, Mounting Type="Through Hole", Number of Positions=6P, Number of Rows=1, PIN Length=3.2mm, Pitch=2.54mm, Row Spacing=-, Supplementary Features=-, Supplier=LCSC, Supplier Footprint=插件,P=2.54mm, SupplierPart=C40877, Symbol=Header-Female-2.54_1x6
P18: library part Female-Header-4P, JLCPCB Part Class="Extended Part", Manufacturer=BOOMELE(博穆精密), Manufacturer Part=2.54-1*4P母, Contributor=LCSC, spicePre=H, spiceSymbolName=2.54-1*4P母, Supplier=LCSC, SupplierPart=C2718488
PWR1 PWR2: library part Barrier-Terminal-2P, "Barrier Type:2-Side Pitch:7.62mm Number of Positions or Pins:1x2P Mounting Type:Straight Pin Location:Side Mount Number of Pins:2P Number of Rows:1 Number of PINs Per Row:2 Current Rating:15A Voltage Rating (Max):300V Wire Gauge - AWG:14~22 Wire Gauge - m", Color=Black, Current Rating=15A, JLCPCB Part Class="Extended Part", LCSC Part Name="7.62mm 1x2P 直插 边脚 排数:1 每排P数:2", Manufacturer=DORABO(地博电气), ManufacturerPart=DBT30S-7.62-2P-BK-P, Operating Temperature=-40℃~+105℃, Voltage Rating (Max)=300V, AddInBom=yes, Barrier Type=2-Side, ConvertToPcb=yes, Datasheet=https://item.szlcsc.com/datasheet/DBT30S-7.62-2P-BK-P/993661.html, FootprintName=CONN-TH_DBT30S-7.62-2P, ModelId=25793e1725c44f5c9873d21a6b0bc5c1, ModelName=CONN-TH_DBT30S-7.62-2P, ModelTransform=659.0538,531.495,0,0,0,0,0,-150.276,-169.291, Mounting Type=Straight, Number of Pins=2P, Number of PINs Per Row=2, Number of Positions or Pins=1x2P, Number of Rows=1, Pin Location="Side Mount", Pitch=7.62mm, Supplier=LCSC, Supplier Footprint=插件,P=7.62mm, SupplierPart=C918082, Symbol=DBT30S-7.62-2P, Wire Gauge - AWG=14~22, Wire Gauge - mm2=-
Q1 Q2: library part NPN-SOT23-30V, "type:NPN Current - Collector(Ic):800mA Collector - Emitter Voltage VCEO:30V Pd - Power Dissipation:200mW DC Current Gain:160 DC Current Gain:160 Transition frequency(fT):120MHz Current - Collector Cutoff:100nA Vce Saturation(VCE(sat)):500mV Operating Temp", Collector - Emitter Voltage VCEO=30V, Current - Collector Cutoff=100nA, Current - Collector(Ic)=800mA, DC Current Gain=160, Emitter-Base Voltage(Vebo)=5V, JLCPCB Part Class="Extended Part", LCSC Part Name="hfe=160~320 NPN 电流:800mA 电压:30V", Manufacturer=CJ(江苏长电/长晶), ManufacturerPart=KTC3265(RANGE:160-320), Operating Temperature=-55℃~+150℃, Pd - Power Dissipation=200mW, Transition frequency(fT)=120MHz, AddInBom=yes, ConvertToPcb=yes, Datasheet=https://item.szlcsc.com/datasheet/KTC3265(RANGE%253A160-320)/9026.html, FootprintName=SOT-23-3_L2.9-W1.3-P1.90-LS2.4-BR, ModelId=62a57c6760504a01965db6419a6d07df, ModelName=SOT-23-3P_L2.9-W1.3-H1.0-LS2.4-P0.95, ModelTransform=98.425,114.173,0,180,0,0,0.0005,-0.0005,0, Number="1 NPN", Supplier=LCSC, Supplier Footprint=SOT-23, SupplierPart=C8531, Symbol="KTC3265 EY", type=NPN, Vce Saturation(VCE(sat))=500mV
R1 R2 R3 R4 R5 R6 R9: library part Resistor-4.7k-0805, "Type:Thick Film Resistors Resistance:4.7kΩ Tolerance:±1% Tolerance:±1% Power(Watts): Overload Voltage (Max): Temperature Coefficient:±100ppm/℃ Temperature Coefficient:±100ppm/℃ Operating Temperature Range:-55℃~+155℃ Operating Temperature Range:-55℃~+155℃", JLCPCB Part Class="Basic Part", LCSC Part Name="4.7kΩ ±1% 125mW 厚膜电阻", Manufacturer=UNI-ROYAL(厚声), ManufacturerPart=0805W8F4701T5E, Operating Temperature Range=-55℃~+155℃, Temperature Coefficient=±100ppm/℃, Tolerance=±1%, AddInBom=yes, ConvertToPcb=yes, Datasheet=https://atta.szlcsc.com/upload/public/pdf/source/20200306/C422600_1E6D84923E4A46A82E41ADD87F860B5C.pdf, FootprintName=R0805, ModelId=b83c7c5430874b8eb2319a65d9433429, ModelName=R0805_L2.0-W1.3-H0.6, ModelTransform=78.74,51.181,0,0,0,0,0,-0.0005,0, Supplier=LCSC, Supplier Footprint=0805, SupplierPart=C17673, Symbol=0805W8F4701T5E, type="Thick Film Resistors"
R7 R8 R10 R11 R12: library part Resistor-1k-0805, "Type:Thick Film Resistors Resistance:1kΩ Tolerance:±1% Tolerance:±1% Power(Watts): Overload Voltage (Max): Temperature Coefficient:±100ppm/℃ Temperature Coefficient:±100ppm/℃ Operating Temperature Range:-55℃~+155℃ Operating Temperature Range:-55℃~+155℃", JLCPCB Part Class="Basic Part", LCSC Part Name="1kΩ ±1% 125mW 厚膜电阻", Manufacturer=UNI-ROYAL(厚声), ManufacturerPart=0805W8F1001T5E, Operating Temperature Range=-55℃~+155℃, Temperature Coefficient=±100ppm/℃, Tolerance=±1%, AddInBom=yes, ConvertToPcb=yes, Datasheet=https://atta.szlcsc.com/upload/public/pdf/source/20200306/C422600_1E6D84923E4A46A82E41ADD87F860B5C.pdf, FootprintName=R0805, ModelId=b83c7c5430874b8eb2319a65d9433429, ModelName=R0805_L2.0-W1.3-H0.6, ModelTransform=78.74,51.181,0,0,0,0,0,-0.0005,0, Supplier=LCSC, Supplier Footprint=0805, SupplierPart=C17513, Symbol=0805W8F1001T5E, type="Thick Film Resistors"
R13: library part Resistor-220-0805, "Type:Thick Film Resistor Resistance:220Ω Tolerance:±1% Tolerance:±1% Power(Watts):125mW Voltage-Supply(Max):150V Temperature Coefficient:±100ppm/℃ Temperature Coefficient:±100ppm/℃ Operating Temperature:-55℃~+155℃ Operating Temperature:-55℃~+155℃", JLCPCB Part Class="Basic Part", LCSC Part Name="厚膜电阻 220Ω ±1%", Manufacturer=UNI-ROYAL(厚声), Manufacturer Part=0805W8F2200T5E, Operating Temperature=-55℃~+155℃, Power(Watts)=125mW, Temperature Coefficient=±100ppm/℃, Tolerance=±1%, Voltage-Supply(Max)=150V, AddInBom=yes, ConvertToPcb=yes, Datasheet=https://item.szlcsc.com/datasheet/0805W8F2200T5E/18245.html, FootprintName=R0805, ModelId=b83c7c5430874b8eb2319a65d9433429, ModelName=R0805_L2.0-W1.3-H0.6, ModelTransform=78.74,51.181,0,0,0,0,0,-0.0005,0, Supplier=LCSC, Supplier Footprint=0805, SupplierPart=C17557, Symbol=0805W8F2200T5E, type="Thick Film Resistor"
SW1: library part Tactile-SPST-Long, "Circuit:SPST Actuator Style:Round Button Operating Force:2.5N Mounting Type:Through Hole Length:6mm Width:6mm Switch Height:8.5mm Contact Current:50mA Voltage Rating:12V With Lamp:- Life:-", Contact Current=50mA, JLCPCB Part Class="Extended Part", LCSC Part Name="6*6*8.5mm 直插 轻触开关", Manufacturer=YE, Manufacturer Part=TS6685H-250gf, Operating Force=2.5N, Voltage Rating=12V, Actuator Style="Round Button", AddInBom=yes, Circuit=SPST, ConvertToPcb=yes, Datasheet=https://item.szlcsc.com/datasheet/TS6685H-250gf/14483.html, FootprintName=SW-TH_4P-L6.0-W6.0-P4.50-LS6.5, Length=6mm, Life=-, ModelId=1b2aa19db9484d8f9f922c3504714525, ModelName=SW-TH_4P-L6.0-W6.0-H5.0-LS6.5-P4.50, ModelTransform=236.22,323.03,0,90,0,0,0,0,-137.795, Mounting Type="Through Hole", Supplier=LCSC, Supplier Footprint=插件, SupplierPart=C13828, Switch Height=8.5mm, Symbol=C13828, Width=6mm, With Lamp=-

## Free pads (board coordinates)
  round 0 hole 20 unplated: 14(2487,4753) 14(2529,4753) 14(3030,4046) 14(3030,4088) 14(3534,3550) 14(3576,3550) 14(3954,2789) 14(3954,2831) 14(5444,2789) 14(5444,2831) 14(7154,2789) 14(7154,2831) 19(2487,4793) 19(2529,4793) 19(2990,4046) 19(2990,4088) 19(3534,3510) 19(3576,3510) 19(3994,2789) 19(3994,2831) 19(5484,2789) 19(5484,2831) 19(7194,2789) 19(7194,2831) 20(2487,4833) 20(2529,4833) 20(2950,4046) 20(2950,4088) 20(3534,3470) 20(3576,3470) 20(4034,2789) 20(4034,2831) 20(5524,2789) 20(5524,2831) 20(7234,2789) 20(7234,2831) 21(2487,4873) 21(2529,4873) 21(2910,4046) 21(2910,4088) 21(3534,3430) 21(3576,3430) 21(4074,2789) 21(4074,2831) 21(5564,2789) 21(5564,2831) 21(7274,2789) 21(7274,2831)
  round 157.48 hole 122.05 unplated: 22(150,135) 22(2665,4785) 22(3030,3861.22) 22(6745,450) 22(7135,3030)

## Via types
v1: diameter 33, hole 13, Top Layer to Bottom Layer, 64 vias

## Nets (pads, with @x,y where several pads share a name; then routed paths per layer and width w, separated by ;. In a path a pad name is that pad's centre, name@x,y a point inside that pad or via, vN(x,y) a via of type N, cw(c..) or ccw(c..) an arc to the next point about the centre after c; other vN are vias at no path point)
3V3_DB: C9.1 P18.2 PWR_DB2.1 R9.2 R13.1 | length 3786.3
  Top Layer w20: R13.1 3638.91,4755.7 3658.56,4775.35 3842.25,4775.35 PWR_DB2.1 ; R9.2 3950.6,3826.17 3891.77,3885 3835,3885 3655,4065 3655,4469.4 PWR_DB2.1 ; C9.1 5824,4609 5824,4566 5801,4543 5210,4543 4976.65,4776.35 4131.82,4776.35 4071.47,4716 PWR_DB2.1 ; P18.2@5840,4742.3 P18.2
3V3_MB: C8.2 C10.1 J2.1 P1.1 P1.2 P4.7 P5.3 P6.7 P7.6 P8.2 P8.3 P9.7 P10.2 P11.7 PWR_DB1.1 R2.1 R3.2 R4.2 R5.2 R6.2 | length 20786.2
  Top Layer w20: P11.7 704,1210 727,1233 836,1233 ; P10.2@1077,715 836,956 836,1233 ; v1@1241,1507 1239,1505 836,1505 ; v1@1326.49,1423.51 v1(1324,1426) 1326,1428 1398,1428 ; 1524,2394 1521,2397 ; P6.7 1552,1210 1398,1364 1398,1428 ; v1(1906,1413) 1736,1413 1733,1410 ; v1(1972.28,1475.58) 2155.42,1475.58 2223,1408 2260,1408 v1(2261,1409) ; P5.3 1733,1204 1733,1410 ; v1(2366,1409) 2505,1409 ; J2.1 2379,4608 2159,4388 2159,2798 ; P9.7@2750,1215 2622,1215 2506,1331 2506,1408 2505,1409 ; R4.2 2860.65,2069.35 2324.35,2069.35 R5.2 R6.2 1692.3,2073.7 1662,2104 1662,2397 ; P8.2@3252,715 3188.55,778.45 3188.55,822.45 ; P8.3@3252,815 3244.55,822.45 3188.55,822.45 ; v1(3313,1460) 3031,1460 2980,1409 2932,1409 ; v1(3409,1362) 3505,1266 3505,1250 3540,1215 P4.7 ; 5900,2145 5900,2295 5855,2340 5855,2670 ; R3.2@6275,1446.3 6399.65,1446.3 6428.65,1475.3 R2.1 6737.18,1475.3 v1@6747.48,1465 ; 6751,1278 6752,1279 v1(6752,1374) ; 6899,1220 7057,1220 7194,1357 7194,2418 ; PWR_DB1.1 7124,2332.8 7124,2383 7159,2418 7194,2418 ; 836,1233 836,1505 ; 836,1505 836,2001 1232,2397 1521,2397 ; 1398,1428 1715,1428 1733,1410 ; 1521,2397 1662,2397 ; 1662,2397 1902,2397 2159,2654 2159,2798 ; 2159,2798 3201,2798 3329,2670 5855,2670 ; 2505,1409 2932,1409 ; 2932,1409 2934,1407 2934,1215 3094,1055 3094,917 3188.55,822.45 ; 5855,2670 7130,2670 7194,2606 7194,2418
  Bottom Layer w20: v1@1242.75,1505.25 1322,1426 v1(1324,1426) ; v1(1906,1413) 1907.85,1413 1970.43,1475.58 v1(1972.28,1475.58) ; v1(2261,1409) v1(2366,1409) ; v1(3313,1460) 3409,1364 v1(3409,1362) ; v1(6751,1465) 6751.5,1464.5 6751.5,1374.5 v1(6752,1374)
  other v1: 1246,1500
24V: BED_PWM.1 BED_PWR.1 C1.1 C2.1 C3.1 C4.1 D1.1 FAN.1 FAN_PWM.1 HEAD_PWR.1 J1.1 P4.1 P6.1 P9.1 P11.1 PWR1.1 PWR2.1 | length 13932.8
  Top Layer w40: C3.1 267,571.15 267,591.55 271.8,596.35 471.35,596.35 485,610 P11.1 ; 465,3065 1853,3066 1948,2971 1948,2707 v1(2019,2636) ; C2.1 1447.3,545.3 1517,615 P6.1@1642,615 ; v1(2132,2528) 3353,2528 3413,2588 3741,2588 3825,2504 v1(3900,2504) ; C4.1 2527.3,545.3 2597,615 P9.1@2750,615 ; C1.1 3662.3,545.3 3732,615 P4.1 ; BED_PWM.1 3640.15,2205.15 3640.15,2270.15 3665,2295 3731,2295 3819,2383 ; 3820.91,2384.91 4212.09,2384.91 4320.7,2276.3 FAN.1 ; D1.1 3945.6,2146.82 3986.5,2187.72 FAN_PWM.1 3986.5,2382
  Top Layer w70: HEAD_PWR.1 136.4,701.75 C3.1@267,571.15 ; C3.1 267,519.45 464,322.45 464,159 540,83 1178,83 1357,262 ; C2.1 1357,262 ; C4.1 2452,354 ; C1.1 3582,325 3340,83 2739.01,83 2698,124.01 2698,278 2622,354 2452,354 ; 1357,262 1528,262 1578,212 1578,130 1629,79 2177,79 2452,354
  Bottom Layer w40: v1(2019,2636) 2127,2528 v1(2132,2528) ; v1(3899,2383) 3899,2503 v1(3900,2504)
"BED ADC": BED_ADC.1 P1.5 R3.1 | length 656.9
  Top Layer w6: 6275,1709.65 6275,1525 6279.3,1520.7 6440.3,1520.7 v1(6445,1516) ; v1(6443,1363) 6446.01,1223.99 P1.5
  Bottom Layer w6: v1(6443,1363) 6444,1364 6444,1515 v1(6445,1516)
"BED MOS PWM": P1.6 R7.2 | length 3035.1
  Top Layer w6: R7.2 3684.1,1666.3 3720.9,1629.5 5136.87,1629.5 5266.37,1759 5364.69,1759 5384.69,1739 v1@5385,1739 ; v1(5485.36,1649.64) 5490.53,1644.47 5490.53,1631.17 5493.76,1627.94 5493.76,1624.24 5498,1620 5991,1620 v1(6158,1453) v1@6150.69,1453 ; v1(6157,1365) 6205,1365 P1.6
  Bottom Layer w6: v1@5385,1739 5392.31,1739 5405.21,1726.1 5412.4,1726.1 5444.12,1694.38 5444.12,1690.88 v1(5485.36,1649.64) ; v1(6157,1365) 6157.5,1365.5 6157.5,1452.5 v1(6158,1453)
  other v1: 5394,1738
BTN: BTN_CN2.1 R9.1 SW1.1 | length 1672.9
  Top Layer w6: SW1.1 4181.6,3780 R9.1 4027.61,3781.69 4027.61,3812.59 3685,4155.2 3685,4325 3874.04,4514.04 4150.64,4514.04 BTN_CN2.1
"DIR E": P2.6 P10.8 | length 6351.2
  Top Layer w6: P10.8@1077,1315 1119,1273 1175,1273 1196,1294 1196,1393.25 1373.75,1571 4505.17,1571 4665.26,1410.9 4665.26,1160.27 4739.53,1086 5694,1086 v1(6365,415) ; v1(6312,370) 6312.36,370 6347.83,334.53 6347.83,222.17 P2.6
  Bottom Layer w6: v1@6312,369 v1(6312,370) 6316,370 6361,415 v1(6365,415)
"DIR X": P2.18 P3.8 | length 1665.3
  Top Layer w6: P3.8 4446,1273 4533.63,1273 4552,1254.63 4552,1118 4684.26,985.74 4877.26,985.74 v1(5231,632) ; P2.18 5143,227 5143,337 5187.54,381.54 5187.54,559.46 v1(5167,580)
  Bottom Layer w6: v1(5167,580) 5173,580 5225,632 v1(5231,632)
"DIR Y": P2.10 P8.8 | length 3667.6
  Top Layer w6: P8.8@3252,1315 3437,1500 4479.63,1500 4590,1389.63 4590,1140 4712.26,1017.74 5383.82,1017.74 5385.58,1015.98 cw(c5381.34,1011.74) 5385.72,1015.84 5523.49,869.88 ccw(c5527.86,873.99) 5523.63,869.73 ; 5523.67,869.7 5947.47,455.63 5949.9,455.62 v1(5975.49,455.5) ; v1@5920.35,403.39 5927.17,410.2 5932.14,410.2 5941.25,401.09 5941.25,228.75 P2.10
  Bottom Layer w6: v1(5920.31,403.39) 5921.89,403.39 5974,455.5 v1(5975.49,455.5)
"DIR Z": P2.8 P5.8 | length 5089.8
  Top Layer w6: P5.8 2169,1268 2241,1268 2294,1321 2294,1484.63 2341.37,1532 4493.25,1532 4633,1392.25 4633,1147.28 4730.28,1050 5530.63,1050 v1@6180.31,400.31 ; v1@6143,368 6146.25,364.75 6146.25,223.75 P2.8
  Bottom Layer w6: v1@6143,368 6145.5,368 6177.81,400.31 v1@6180.31,400.31
  other v1: 6138,365 6185.31,404.31
"ENDST X": C5.2 P2.4 R4.1 R10.1 | length 6723.1
  Top Layer w6: R10.1@2986.3,1935 2904.8,1935 2869.8,1970 2865,1970 C5.2 2809,1885 2777,1853 2777,1725 2843,1659 3316,1659 3492,1835 3492,2281.25 3670.75,2460 4472.25,2460 4845,2087.25 4845,1745.5 v1@4904,1686.5 ; v1@4904,1567.5 4845.65,1567.5 4837.15,1576 4764,1576 4682,1494 4682,1166.16 4736.16,1112 5712.78,1112 6405.78,419 6417,419 6464.78,371.22 6464.78,305.22 P2.4
  Bottom Layer w6: v1@4904,1567.5 v1@4904,1686.5
  other v1: 4904,1560.5 4904,1691.5
"ENDST Y": C6.2 P1.20 R5.1 R12.1 | length 4825.5
  Top Layer w6: R12.1@2446.3,1935 2384.8,1935 2324.8,1995 R5.1 C6.2 2267,1885 2223,1841 2223,1677 2257,1643 3322.63,1643 3508,1828.37 3508,2274.63 3677.37,2444 4465.63,2444 4829,2080.63 4829,1687.5 v1@4828,1686.5 ; v1@4827,1551.5 4827,1477 4950,1354 P1.20 ; v1@4828,1678 4828,1685.5 v1@4829,1686.5
  Bottom Layer w6: v1@4827,1551.5 4827,1685.5 v1@4828,1686.5
  other v1: 4826,1544.5 4827,1691.5
"ENDST Z": C7.2 P1.13 R6.1 R11.1 | length 6247.6
  Top Layer w6: R11.1@1850,1925 1819.8,1925 1749.8,1995 R6.1 C7.2 1685,1885 1657,1857 1657,1717 1747,1627 3329.25,1627 3524,1821.75 3524,2268 3684,2428 4459,2428 4813,2074 4813,1729 4793,1709 4793,1675 4806,1662 5069,1662 5204,1797 5400,1797 5416,1781 v1(5436,1781) ; v1@5526,1688 v1(5529,1691) 5613.5,1691 v1@5660,1644.5 ; P1.13 5649,1221 5649,1297 5659,1307 v1(5659,1350) v1@5659,1360 ; v1(5658,1450) 5659,1451 5659,1562.5 v1@5660,1563.5
  Bottom Layer w6: 5432,1765 5455,1765 v1(5529,1691) v1@5529.14,1690.86 ; v1(5658,1450) 5658.5,1449.5 5658.5,1360.5 v1@5659,1360 ; v1@5660,1563.5 v1@5660,1644.5
  other v1: 5660,1558.5 5660,1649.5
"FAN PWM": P1.8 R8.1 | length 2656.7
  Top Layer w6: R8.1 3937.8,1695.2 3987.5,1645.5 5118.22,1645.5 v1@5196.86,1724.14 ; v1@5247,1679 5253.39,1679 5273.39,1659 v1@5314,1659 ; v1(5403,1566) 5450,1566 5470.24,1586.24 5472,1588 5660,1588 cw(c5660,1558.5) 5669.9,1586.29 5907.61,1586.29 v1(6041.95,1451.95) ; v1@6037,1365 6037,1333 P1.8 ; v1@6040.83,1360.83 v1@6046,1366
  Bottom Layer w6: v1@5196.86,1724.14 5199.36,1724.14 5244.5,1679 v1@5247,1679 ; v1(5310,1656) 5313,1656 v1(5403,1566) ; v1@5314,1657.69 v1@5314,1659 ; v1@6045.97,1366.03 v1@6045.97,1451.92
  other v1: 6038,1366 5250,1677 5192.86,1728.14
GND_DB: BTN_CN2.2 C9.2 I2C_2.2 I2C_2.4 LED1.1 P18.1 PWR_DB2.2 SW1.3 | length 94
  Top Layer w6: v1(3453,4407) 3453,4489.4 LED1.1
  Top Layer w20: P18.1 P18.1@5747.2,4747.8
GND_MB: BED_ADC.2 BED_PWR.2 BTN_CN1.2 C1.2 C2.2 C3.2 C4.2 C5.1 C6.1 C7.1 C8.1 C10.2 FAN.2 HEAD_ADC.2 HEAD_PWR.2 I2C_1.2 I2C_1.4 J3.1 J4.1 J6.1 J7.2 J8.2 J9.2 P1.22 P2.1 P2.21 P2.22 P3.1 P3.2 P3.3 P4.2 P4.8 P5.1 P5.2 P6.2 P6.8 P7.1 P8.1 P9.2 P9.8 P10.1 P10.3 P11.2 P11.8 PWR1.2 PWR2.2 PWR_DB1.2 Q1.2 Q2.2 | length 2624.7
  Top Layer w6: C7.1 1826.2,1806.2 1855,1835 J9.2 ; C6.1 2400.2,1806.2 2429,1835 J8.2 ; C5.1 2936.2,1806.2 2969,1839 3191,1839 J7.2
  Top Layer w20: Q1.2 3737.55,1889.85 3797.15,1889.85 v1(3798,1889) ; Q2.2 4174.55,1741.35 4229.35,1741.35 v1(4230,1742) ; v1(6712,992) 6713.1,993.1 6796.9,993.1 C8.1
  Top Layer w40: C3.2 352.3,804.7 422,735 550,735 P11.2 ; C2.2 1357,799.8 1361.8,795 1437,795 1522,710 P6.2 1637,710 P6.2@1642,715 ; C4.2 2452,799.8 2456.8,795 2517,795 2597,715 P9.2@2750,715 ; C1.2 3582,799.8 3586.8,795 3647,795 3727,715 P4.2 ; P3.1 P3.1@4409,620
  Bottom Layer w6: 4683.14,1062.14 4689.14,1056.14
"HEAD ADC": HEAD_ADC.1 P1.4 R2.2 | length 620.9
  Top Layer w6: P1.4 v1(6551,1364) ; v1@6550,1513 v1(6547,1516) 6551,1520 6659.3,1520 HEAD_ADC.1@6659.3,1725
  Bottom Layer w6: v1(6547,1516) 6548.5,1514.5 6548.5,1366.5 v1(6551,1364)
"HEAD MOS PWM": J5.1 P1.7 | length 5383.5
  Top Layer w6: J5.1 1523,1592 5122,1592 5259,1729 5340,1729 5344.24,1724.76 5344.24,1722.06 5348.83,1717.47 5348.83,1702.17 v1@5354,1697 ; v1(5443.86,1608.14) 5448,1604 5947,1604 v1(6100,1451) ; v1@6096,1368 6096,1340.5 6154.67,1281.83 6188.17,1281.83 P1.7
  Bottom Layer w6: v1@5354,1697 5361.31,1697 5375.21,1683.1 5380.4,1683.1 5429.46,1634.04 5429.46,1629.8 5443.86,1615.4 v1(5443.86,1608.14) ; v1@6096,1368 6098,1370 6098,1449 v1(6100,1451)
  other v1: 6099,1368 5353,1696
"I2C OLED SCL": I2C_1.3 P1.15 | length 2123
  Top Layer w6: P1.15 5450,1239 5597.74,1386.74 5894.12,1386.74 5928.87,1421.5 6687.28,1421.5 6701.28,1435.5 6829.75,1435.5 6834.75,1430.5 6880.14,1430.5 6885.14,1435.5 6920.5,1435.5 7033,1548 7033,1808.2 I2C_1.3
"I2C OLED SDA": I2C_1.1 P1.12 | length 1496.4
  Top Layer w6: P1.12 5935.5,1405.5 6693.91,1405.5 6707.91,1419.5 6823.13,1419.5 6828.13,1414.5 6924.5,1414.5 7015.5,1505.5 I2C_1.1
"M1A E": CN5.2 P11.4 | length 753.6
  Top Layer w40: P11.4 575.8,910 775.8,710 CN5.2
"M1A X": CN2.2 P4.4 | length 759.7
  Top Layer w40: P4.4 4106.6,710.4 CN2.2
"M1A Y": CN3.2 P9.4 | length 760.2
  Top Layer w40: P9.4@2750,915 2955.8,709.2 CN3.2
"M1A Z": CN4.2 P6.4 | length 757.6
  Top Layer w40: P6.4 1836.6,698.4 CN4.2
"M1B E": CN5.1 P11.3 | length 616.6
  Top Layer w40: P11.3 682.4,702.6 682.4,245 CN5.1
"M1B X": CN2.1 P4.3 | length 619
  Top Layer w40: P4.3 4008.2,708.8 CN2.1
"M1B Y": CN3.1 P9.3 | length 619.5
  Top Layer w40: P9.3@2750,815 2857.4,707.6 CN3.1
"M1B Z": CN4.1 P6.3 | length 616.9
  Top Layer w40: P6.3 1738.2,696.8 CN4.1
"M2A E": CN5.3 P11.5 | length 918.9
  Top Layer w40: P11.5@575,1035 874.2,735.8 CN5.3
"M2A X": CN2.3 P4.5 | length 900.5
  Top Layer w40: P4.5 4205,712 CN2.3
"M2A Y": CN3.3 P9.5 | length 901
  Top Layer w40: P9.5@2750,1015 3054.2,710.8 CN3.3
"M2A Z": CN4.3 P6.5 | length 898.4
  Top Layer w40: P6.5 1935,700 CN4.3
"M2B E": CN5.4 P11.6 | length 1040.8
  Top Layer w40: P11.6 582.28,1110 595.73,1096.55 598.85,1096.55 972.7,722.7 CN5.4
"M2B X": CN2.4 P4.6 | length 1041.3
  Top Layer w40: P4.6 4303.5,713.5 CN2.4
"M2B Y": CN3.4 P9.6 | length 1041.8
  Top Layer w40: P9.6@2750,1115 3152.7,712.3 CN3.4
"M2B Z": CN4.4 P6.6 | length 1039.2
  Top Layer w40: P6.6 2033.5,701.5 CN4.4
NetBED_PWM_2: BED_PWM.2 Q1.3 | length 244.8
  Top Layer w40: Q1.3 3699.3,2035 3733.5,2069.2 BED_PWM.2
NetD1_2: D1.2 FAN_PWM.2 Q2.3 | length 396.9
  Top Layer w40: FAN_PWM.2 4085,2014.35 4136.5,1962.85 Q2.3
NetJ7_1: J7.1 R10.2 | length 130
  Top Layer w6: R10.2@3065,1935 J7.1
NetJ8_1: J8.1 R12.2 | length 120
  Top Layer w6: R12.2@2525,1935 J8.1@2645,1935
NetJ9_1: J9.1 R11.2 | length 145.4
  Top Layer w6: R11.2@1928.7,1925 2060,1925 J9.1
NetLED1_2: LED1.2 R13.2 | length 100
  Top Layer w6: LED1.2 R13.2
NetQ1_1: Q1.1 R7.1 | length 152.7
  Top Layer w6: Q1.1 3661.9,1852.4 3684.3,1830 R7.1@3684.3,1747.3
NetQ2_1: Q2.1 R8.2 | length 105
  Top Layer w6: R8.2 4021.5,1780 4066.7,1780 4099.1,1747.6 Q2.1
"OLED SCL": I2C_2.3 P18.3 | length 2522.1
  Top Layer w6: I2C_2.3@4175,4275 4256,4356 4589,4356 4721,4488 5975,4488 6120.54,4633.54 6120.54,4804.46 6096,4829 5953,4829 5943,4819 5943,4758 P18.3
"OLED SDA": I2C_2.1 P18.4 | length 2625.4
  Top Layer w6: I2C_2.1 3781.3,4286.8 3781.3,4351.3 3802,4372 4575,4372 4707,4504 5945,4504 6037.54,4596.54 6037.54,4752.54 P18.4
"SD FSPI CLK": P1.18 P7.3 | length 946.3
  Top Layer w6: P1.18@5141,1229 P1.18 5150,1414.25 5491,1755.25 5491,1936 P7.3
"SD FSPI CS": P1.16 P7.5 | length 933.6
  Top Layer w6: P1.16 5350,1556 5532.75,1738.75 5532.75,1777.75 P7.5
"SD FSPI MISO": P1.19 P7.2 | length 955.2
  Top Layer w6: P1.19 5050,1336.88 5471.06,1757.94 5471.06,1958.78 5445,1984.84 P7.2
"SD FSPI MOSI": P1.17 P7.4 | length 933.6
  Top Layer w6: P1.17 5250,1491 5507,1748 5507,1852 P7.4
"STEP E": P2.5 P10.7 | length 6312.6
  Top Layer w6: P10.7@1077,1215 1119,1257 1181.63,1257 1212,1287.37 1212,1386.63 1380.37,1555 4498.54,1555 4649.26,1404.28 4649.26,1153.64 4732.9,1070 5676.15,1070 5677.9,1068.24 cw(c5673.66,1064) 5677.97,1068.18 6450,283 P2.5
"STEP X": P2.17 P3.7 | length 1579.4
  Top Layer w6: P3.7 4446,1257 4527,1257 4535,1249 4535,1103 4668.26,969.74 4842,969.74 5164.74,647 5166,647 5250,563 P2.17
"STEP Y": P2.9 P8.7 | length 3704.7
  Top Layer w6: P8.7@3252,1215 3291,1215 3310,1234 3310,1350.37 3443.63,1484 4473,1484 4572,1385 4572,1134 4704.26,1001.74 5366.07,1001.74 5367.81,999.99 cw(c5363.58,995.74) 5367.85,999.95 6050,314.97 P2.9
"STEP Z": P2.7 P5.7 | length 5070.4
  Top Layer w6: P5.7 2169,1252 2247.63,1252 2310,1314.37 2310,1478 2348,1516 4486.63,1516 4617,1385.63 4617,1140.65 4723.65,1034 5511.98,1034 5515.49,1030.49 5636.71,911.01 cw(c5616,890) 5636.89,910.83 6151.37,394.61 6250,295.98 P2.7
"TMC UART RX": P1.11 P3.4 P5.4 P8.4 P10.4 R1.2 | length 8486.4
  Top Layer w6: P10.4@1077,915 1262,1100 1262,1414 1387,1539 1841,1539 1988,1392 1988,1049 P5.4 2261,1044 2261,1239 2332,1310 2332,1472 2356,1496 3374,1496 3382,1488 3382,1467.63 3301.37,1387 3201,1387 3193,1379 3193,928 3206,915 3252,915 3253,914 3297,914 3310,927 3310,1207 3330,1227 3330,1347.75 3450.25,1468 4187,1468 4302,1353 4302,1017 P3.4 4499,915 4666,748 v1(4987,748) ; v1(5096,822) 5435,822 v1(5464,851) ; v1(5529,910) 5556,883 v1(5610,883) ; v1@5683.5,940 5689,945.5 5750.5,945.5 5774.67,921.33 5774.67,913.33 v1(5804,884) ; P1.11 5850,1077.3 R1.2 5861.3,1020.01 5906,975.31 v1(5906,973)
  Bottom Layer w6: v1(4987,748) 5022,748 v1(5096,822) v1@5091.9,826.1 ; v1(5464,851) 5467,851 5526,910 v1(5529,910) ; v1(5610,883) 5652.1,925.1 5662.34,925.1 5677.24,940 v1@5683.5,940 ; v1(5804,884) 5810.5,884 5899.5,973 v1(5906,973)
  other v1: 5678.5,946
"TMC UART TX": P1.10 R1.1 | length 158.1
  Top Layer w6: R1.1 5950,1076 P1.10
"USER BTN": BTN_CN1.1 P2.16 | length 4031.4
  Top Layer w6: P2.16 5435,135 6567,135 6602,170 6602,1290.96 6714.54,1403.5 6816.5,1403.5 v1(6859,1361) ; BTN_CN1.1 7013,2262.2 7013,1570 6903,1460 v1(6857,1460)
  Bottom Layer w6: v1(6857,1460) 6858,1459 6858,1362 v1(6859,1361)